# Altium PCB RadCounterX4_PCB.PcbDoc
Units mil, origin at the board's own origin, x right, y up, seen from the top; angles counter-clockwise.
Board outline 1510 x 1880 mil, 2 copper layers (Top Layer, Bottom Layer); 40 components, 42 nets, 192 pads, 81 vias.
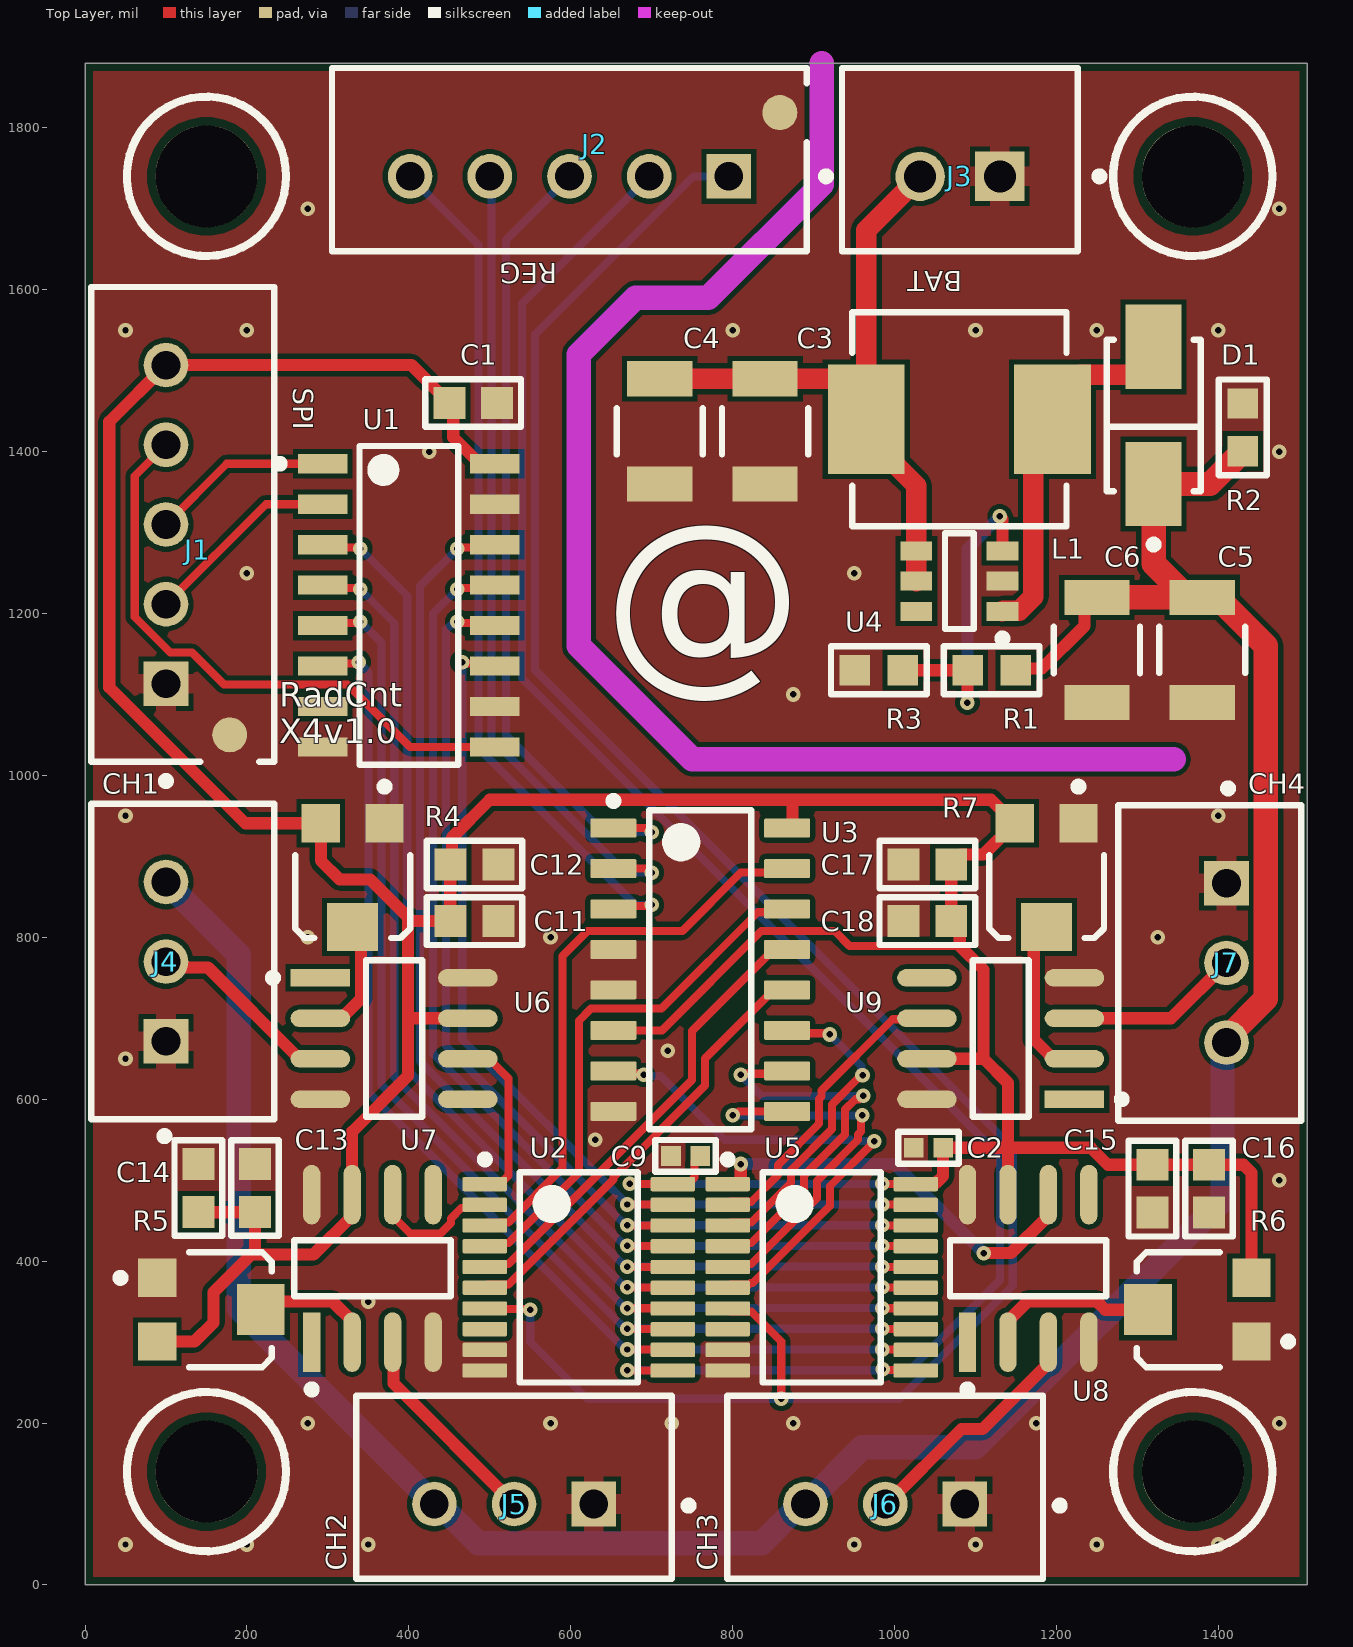
[diagram p0: Top Layer view]
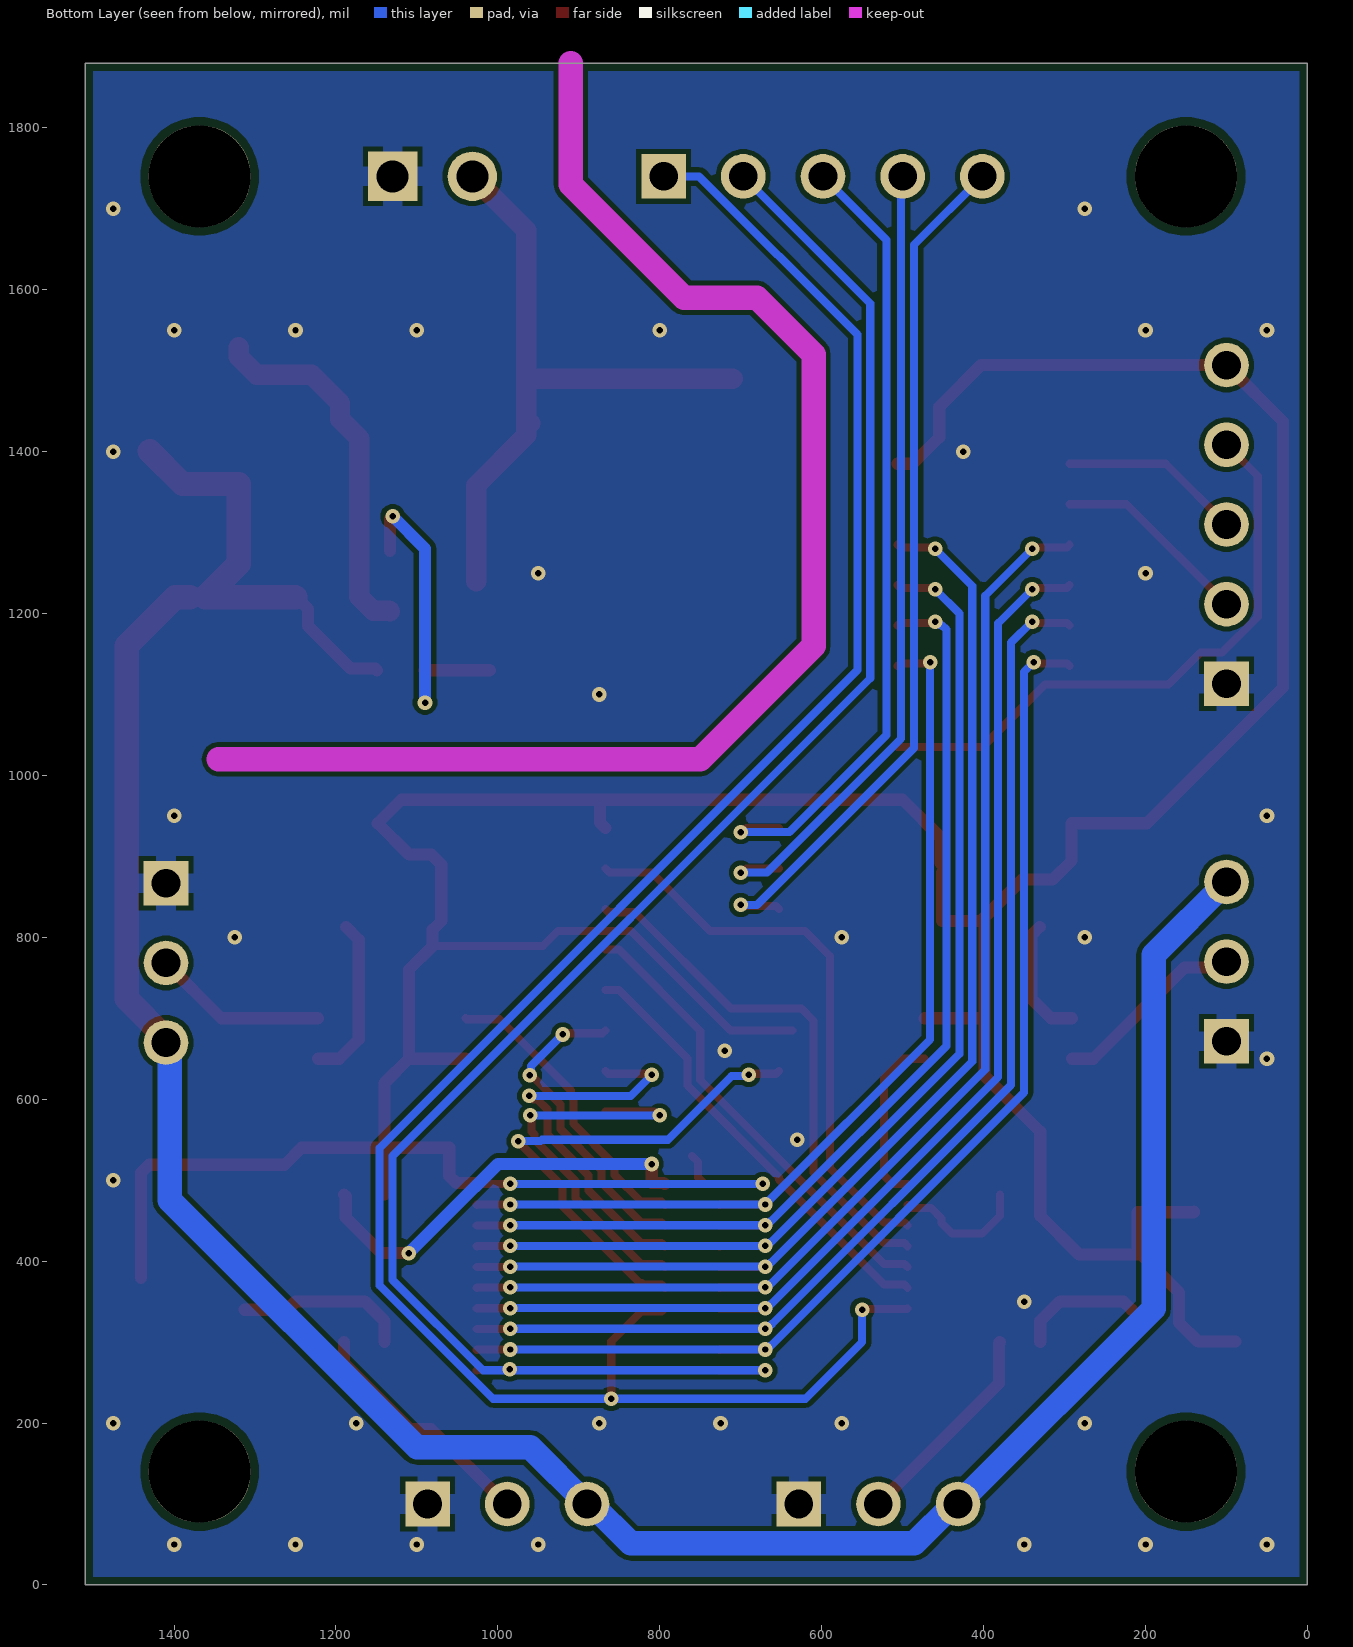
[diagram p1: Bottom Layer view, seen from below]
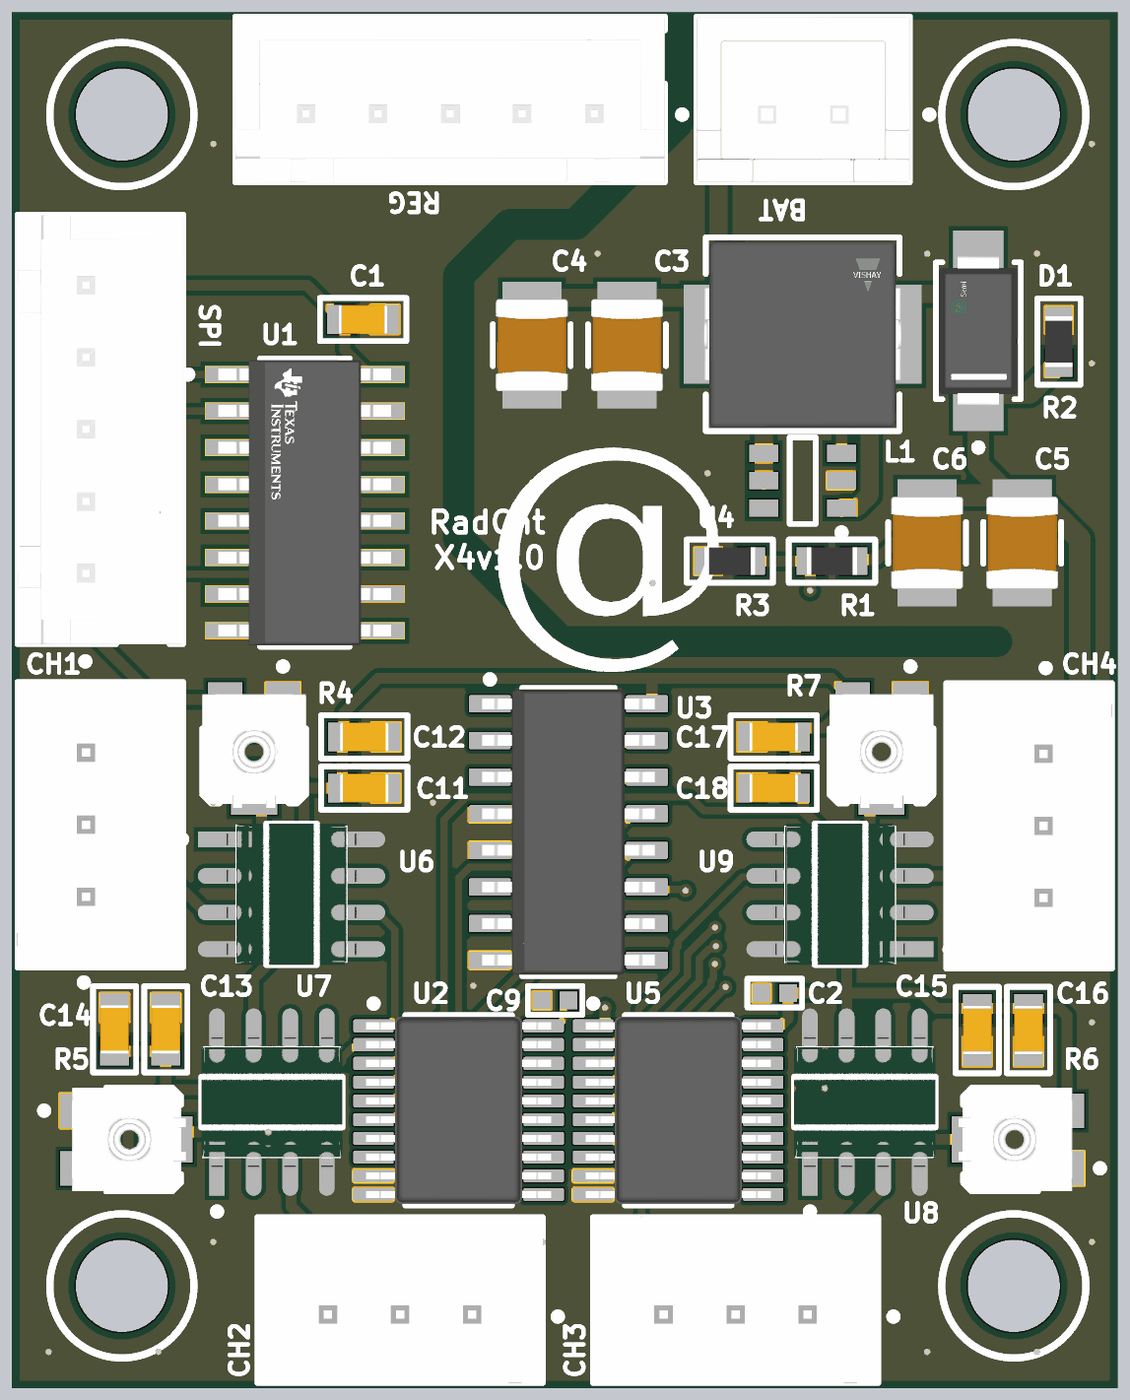
[diagram p2: 3D render of the assembled board from above, using the file's embedded part models]

## Layer stack, top to bottom
Top Solder: solder mask 0.4, Solder Resist, Dk 3.5
Top Layer: signal copper 1.4
Dielectric 1: dielectric 12.6, FR-4, Dk 4.8
Bottom Layer: signal copper 1.4
Bottom Solder: solder mask 0.4, Solder Resist, Dk 3.5

## Board outline
0,0 1510,0 1510,1880 0,1880

## Design rules (kind name [scope] priority, off if disabled: settings)
BoardOutlineClearance [All] p1: gap=10 ignorepadtopadclearanceinfootprint=FALSE except(0: Arc-SplitContinuation Track-SplitContinuation SMDPad-SplitContinuation THPad-SplitContinuation Via-SplitContinuation Fill-SplitContinuation Poly-SplitContinuation Region-SplitContinuation Text-SplitContinuation)
Clearance Clearance_Ant [InNet('ANT')] p1: gap=20 ignorepadtopadclearanceinfootprint=TRUE except(0: Via-Text Fill-Text Poly-Text Region-Text Text-Text; 8: Via-Fill Via-Poly Via-Region Fill-Fill Fill-Poly Fill-Region Poly-Poly Poly-Region Region-Region; 10: Arc-SMDPad Track-SMDPad Via-Hole Fill-Hole Poly-Hole Region-Hole Text-Hole)
Clearance [All] p2: gap=6 ignorepadtopadclearanceinfootprint=TRUE except(0: Arc-Text Track-Text SMDPad-Text THPad-Text Via-Text Fill-Text Poly-Text Region-Text Text-Text; 10: Arc-Hole Track-Hole SMDPad-SMDPad SMDPad-THPad SMDPad-Via SMDPad-Hole THPad-THPad THPad-Via THPad-Hole Via-Hole Fill-Hole Poly-Hole Region-Hole Text-Hole)
MinimumSolderMaskSliver [All] p1: minsoldermaskwidth=2
PolygonConnect PolygonConnect_Ant [HasFootprint('433MHz_Ant')] p1: thpad.connectstyle=Relief thpad.reliefconductorwidth=25 thpad.reliefentries=4 thpad.polygonreliefangle="90 Angle" thpad.airgapwidth=10 smdpad.connectstyle=Direct smdpad.reliefconductorwidth=25 smdpad.reliefentries=4 smdpad.polygonreliefangle="90 Angle" smdpad.airgapwidth=10 via.connectstyle=Direct via.reliefconductorwidth=25 via.reliefentries=4 via.polygonreliefangle="90 Angle" via.airgapwidth=0
PolygonConnect [All] p2: thpad.connectstyle=Relief thpad.reliefconductorwidth=25 thpad.reliefentries=4 thpad.polygonreliefangle="90 Angle" thpad.airgapwidth=6 smdpad.connectstyle=Direct smdpad.reliefconductorwidth=10 smdpad.reliefentries=4 smdpad.polygonreliefangle="90 Angle" smdpad.airgapwidth=10 via.connectstyle=Direct via.reliefconductorwidth=25 via.reliefentries=4 via.polygonreliefangle="90 Angle" via.airgapwidth=0
RoutingVias [All] p1: holewidth=8 width=18 viastyle="Through Hole" minholewidth=8 minwidth=18 maxholewidth=24 maxwidth=50
SilkToSilkClearance [All] p1: silktosilkclearance=0
SilkToSolderMaskClearance [IsPad] p1: minsilkscreentomaskgap=1 clearancetoexposedcopper=TRUE
SolderMaskExpansion SolderMaskExpansion_via [IsVia] p1: expansion=4 istentingtop=TRUE
SolderMaskExpansion [All] p2: expansion=2 istentingtop=FALSE
SupplyNets "Schematic Supply Nets_4" [InNet('Vbat')] p1: voltage=0.000
SupplyNets "Schematic Supply Nets_1" [InNet('+27')] p2: voltage=0.000
SupplyNets "Schematic Supply Nets_6" [InNet('+3.3')] p3: voltage=0.000
SupplyNets "Schematic Supply Nets" [InNet('GND')] p4: voltage=0.000
Width [All] p1: maxlimit=100 minlimit=6 preferedwidth=10
27 further rules are at their usual default settings.

## Components (designator, comment, footprint, x,y, rotation, side; value= is the part's Value field where it differs from the comment)
C1 "100n" C0603 479.53,1460 r180 top
C2 "100n" C0402 1041.89,540 r0 top
C3 "10u" FP-GRM32-MFG 840,1425.04 r270 top value=10uF
C4 "10u" FP-GRM32-MFG 710,1425.04 r270 top value=10uF
C5 "10u" FP-GRM32-MFG 1380,1155.04 r270 top value=10uF
C6 "10u" FP-GRM32-MFG 1250,1154.96 r270 top value=10uF
C9 "100n" C0402 741.89,530 r0 top
C11 "100n" C0603 481.14,820 r0 top
C12 "22u" C0603 481.14,890 r0 top
C13 "100n" C0603 210,490.47 r90 top
C14 "22u" C0603 140,490.47 r90 top
C15 "100n" C0603 1318.43,489.53 r270 top
C16 "22u" C0603 1388.43,489.53 r270 top
C17 "100n" C0603 1040.47,890 r180 top
C18 "22u" C0603 1040.47,820 r180 top
D1 "SS34" FP-403AE-MFG 1320,1444.65 r270 top
J1 "SPI" FP-B5B-XH-AM_LF_SN-MFG 120.67,1310 r270 top
J2 "REG" FP-B5B-XH-AM_LF_SN-MFG 598.43,1760.67 r0 top
J3 "BAT" FP-B2B-XH-A_LF_SN-MFG 1080.79,1760.67 r180 top
J4 "CH1" FP-B3B-XH-A_LF_SN-MFG 120.67,770 r90 top
J5 "CH2" FP-B3B-XH-A_LF_SN-MFG 530,120.67 r180 top
J6 "CH3" FP-B3B-XH-A_LF_SN-MFG 988.43,120.67 r180 top
J7 "CH4" FP-B3B-XH-A_LF_SN-MFG 1389.33,768.43 r270 top
L1 "22uH" FP-IHLP-2525CZ-FP_2_413x3-MFG 1080,1440 r0 top
R1 "442k" R0603 1120,1130 r180 top
R2 "10k" R0603 1430,1430 r270 top
R3 "10k" R0603 980.47,1130 r0 top
R4 "TC33X-2-103E" BOUR-TC33X-2_V 330.67,870 r270 top
R5 "TC33X-2-103E" BOUR-TC33X-2_V 160,340 r0 top
R6 "TC33X-2-103E" BOUR-TC33X-2_V 1370,340 r180 top
R7 "TC33X-2-103E" BOUR-TC33X-2_V 1187.76,870 r270 top
U1 "SN74HC165DR" FP-D0016A-MFG 400,1210 r0 top
U2 "SN74LV8154PWR" PW0020A_N 610,380 r0 top
U3 "SN74HC138D" D0016A_N 760,760 r0 top
U4 "MT3608" SOT23 1080,1240 r180 top
U5 "SN74LV8154PWR" PW0020A_N 910,380 r0 top
U6 "TLV3501AID" FP-D0008A-IPC_C 381.76,675 r0 top
U7 "TLV3501AID" FP-D0008A-IPC_C 355,391.09 r90 top
U8 "TLV3501AID" FP-D0008A-IPC_C 1165,391.09 r90 top
U9 "TLV3501AID" FP-D0008A-IPC_C 1131.09,675 r180 top

## Footprints (in the part's own frame and the unit in brackets; to place one, negate y for a bottom-side part, rotate by r counter-clockwise, add the part's x,y. Pads: shape width x height; smd on the part's side, far side on the other; paste and mask are expansions set on the pad)
BOUR-TC33X-2_V [mm] "SMD, 3-Leads, Body 3.8x3.6mm"
  rect 1.2x1.2 smd: 1(-1.8,1) 3(-1.8,-1)
  rect 1.5x1.6 smd: 2(1.45,0)
  silkscreen extent -3.07,-1.8 1.8,1.8, body extent -2,-1.8 1.96,1.8, height 1.15
C0402 [mm] "Chip Capacitor, 2-Leads, Body 1,00x0,50mm, IPC Medium Density"
  rect 0.62x0.62 smd: 1(-0.46,0) 2(0.46,0)
  silkscreen extent -0.95,-0.5 0.95,0.5, body extent -0.53,-0.28 0.53,0.27, height 0.22
C0603 [mm] "Chip Capacitor, 2-Leads, Body 1,60x0,80mm, IPC Medium Density"
  rect 1x1 smd: 1(-0.75,0) 2(0.75,0)
  silkscreen extent -1.5,-0.75 1.5,0.75, body extent -0.85,-0.5 0.85,0.5, height 0.9
D0016A_N [mm] "SOIC, 16-Leads, Body 10x4mm, Pitch 1.27mm, IPC Medium Density"
  rrect17% 1.45x0.6 smd: 1(-2.725,4.445) 2(-2.725,3.175) 3(-2.725,1.905) 4(-2.725,0.635) 5(-2.725,-0.635) 6(-2.725,-1.905) 7(-2.725,-3.175) 8(-2.725,-4.445) 9(2.725,-4.445) 10(2.725,-3.175) 11(2.725,-1.905) 12(2.725,-0.635) 13(2.725,0.635) 14(2.725,1.905) 15(2.725,3.175) 16(2.725,4.445)
  silkscreen extent -2.85,-5 1.6,5.42, body extent -3,-4.95 3,4.95, height 1.59
FP-403AE-MFG [mm]
  rect 2.65x1.75 smd paste+0 mask+0: 1(-2.15,0) 2(2.15,0)
  silkscreen extent -2.37,-1.48 4.17,1.48, body extent -3.57,-1.58 3.57,1.58, height 0.25
FP-B2B-XH-A_LF_SN-MFG [mm]
  rect 1.55x1.55 hole 1 paste-2539.97 mask+0: 1(-1.25,0.525)
  round 1.55 hole 1 paste-2539.97 mask+0: 2(1.25,0.525)
  silkscreen extent -4.5,-2.88 3.7,2.88, body extent -3.8,-2.98 3.8,2.98, height 0.25
FP-B3B-XH-A_LF_SN-MFG [mm]
  rect 1.4x1.4 hole 0.9 paste-2539.97 mask+0: 1(-2.5,0.525)
  round 1.4 hole 0.9 paste-2539.97 mask+0: 2(0,0.525) 3(2.5,0.525)
  silkscreen extent -5.6,-2.88 4.95,2.88, body extent -5.05,-2.98 5.05,2.98, height 0.25
FP-B5B-XH-AM_LF_SN-MFG [mm]
  rect 1.4x1.4 hole 0.9 paste-2539.97 mask+0: 1(5,-0.525)
  round 1.4 hole 0.9 paste-2539.97 mask+0: 2(2.5,-0.525) 3(0,-0.525) 4(-2.5,-0.525) 5(-5,-0.525)
  round 1.1 smd paste-2539.97 mask+0: ""(6.6,1.475)
  silkscreen extent -7.45,-2.88 8.17,2.88, body extent -7.55,-2.98 7.55,2.98, height 0.25
FP-D0008A-IPC_C [mil]
  rect 73.59x21.34 smd paste+0 mask+0: 1(-91.09,75)
  rrect100% 73.59x21.34 smd paste+0 mask+0: 2(-91.09,25) 3(-91.09,-25) 4(-91.09,-75) 5(91.09,-75) 6(91.09,-25) 7(91.09,25) 8(91.09,75)
  silkscreen extent -154,-97 35,97, body extent -132,-100 132,100, height 10
FP-D0016A-MFG [mm]
  rect 1.55x0.6 smd paste-1000 mask+0: 1(-2.7,4.445) 2(-2.7,3.175) 3(-2.7,1.905) 4(-2.7,0.635) 5(-2.7,-0.635) 6(-2.7,-1.905) 7(-2.7,-3.175) 8(-2.7,-4.445) 9(2.7,-4.445) 10(2.7,-3.175) 11(2.7,-1.905) 12(2.7,-0.635) 13(2.7,0.635) 14(2.7,1.905) 15(2.7,3.175) 16(2.7,4.445)
  silkscreen extent -4.17,-5 1.55,5, body extent -3.57,-5.25 3.57,5.25, height 0.25
FP-GRM32-MFG [mm]
  rect 1.1x2.05 smd paste+0 mask+0: 1(-1.65,0) 2(1.65,0)
  silkscreen extent -0.72,-1.35 0.72,1.35, body extent -2.3,-1.45 2.3,1.45, height 0.25
FP-IHLP-2525CZ-FP_2_413x3-MFG [mil]
  rect 95x135 smd paste+0 mask+0: 1(-115,0) 2(115,0)
  silkscreen extent -132,-132 132,132, body extent -166,-136 166,136, height 10
PW0020A_N [mm] "SOP, 20-Leads, Body 6.6x4.5mm, Pitch 0.65mm, IPC Medium Density"
  rrect22% 1.4x0.45 smd: 1(-2.95,2.925) 2(-2.95,2.275) 3(-2.95,1.625) 4(-2.95,0.975) 5(-2.95,0.325) 6(-2.95,-0.325) 7(-2.95,-0.975) 8(-2.95,-1.625) 9(-2.95,-2.275) 10(-2.95,-2.925) 11(2.95,-2.925) 12(2.95,-2.275) 13(2.95,-1.625) 14(2.95,-0.975) 15(2.95,-0.325) 16(2.95,0.325) 17(2.95,0.975) 18(2.95,1.625) 19(2.95,2.275) 20(2.95,2.925)
  silkscreen extent -3.07,-3.3 1.85,3.82, body extent -3.21,-3.25 3.21,3.25, height 1
R0603 [mm] "Chip Resistor, 2-Leads, Body 1,60x0,80mm, IPC Medium Density"
  rect 0.95x0.95 smd: 1(-0.75,0) 2(0.75,0)
  silkscreen extent -1.5,-0.75 1.5,0.75, body extent -0.87,-0.48 0.87,0.48, height 0.55
SOT23 [mm] "SOT23, 6-Leads, Body 2,90x2,80mm, Pitch 0,95mm, IPC Medium Density"
  rect 1x0.6 smd: 1(-1.35,0.95) 2(-1.35,0) 3(-1.35,-0.95) 4(1.35,-0.95) 5(1.35,0) 6(1.35,0.95)
  silkscreen extent -1.48,-1.5 0.45,1.92, body extent -0.85,-1.5 0.85,1.5, height 1.2

## Part data
C1 C2 C9 C11 C12 C13 C14 C15 C16 C17 C18: library part Capacitor, "Generic SMD Capacitor"
C3 C4 C5 C6: library part CMP-2000-05261-2, "CAP CER 10UF 50V X7R 1210", Capacitance=10uF, Manufacturer=Murata, Manufacturer Part Number=GRM32ER71H106KA12L, Package=GRM32, Temperature="-55°C to +125°C", Temperature Characteristic=X7R, Temperature Coefficient=15%, Temperature Range High=+125°C, Temperature Range Low=-55°C, Tolerance=10%, Voltage Rating=50V, Automotive=No, Category=Cap, ComponentLink2Description=Datasheet, ComponentLink2URL=https://search.murata.co.jp/Ceramy/image/img/A01X/G101/ENG/GRM32ER71H106KA12-01.pdf, Device Class L1="Passive Components", Device Class L2=Capacitors, Device Class L3="Ceramic Capacitors", Digikey Description="CAP CER 10UF 50V X7R 1210", Height=2.7mm, Lead Free=Yes, Material=Ceramic, Mouser Description="1210 10 uF 50 V ±10% Tolerance X7R SMT Multilayer Ceramic Capacitor", Octopart=https://octopart.com/grm32er71h106ka12l-murata-10470987, RoHS=TRUE
D1: library part CMP-2000-04943-2, "DIODE SCHOTTKY 40V 1A SMA", Forward Current=1A, Manufacturer="ON Semiconductor", Max Junction Temp=+125°C, Max Repetitive Reverse Voltage=40V, Max Surge Forward Current=40A, Package=403AE, Peak Reverse Current=0.2mA, Temperature="-65°C to +125°C", Temperature Range Low=-65°C, Automotive=No, Category=Diode, ComponentLink2Description=Datasheet, ComponentLink2URL=https://www.onsemi.com/pub/Collateral/SS19-D.PDF, Device Class L1="Discrete Semiconductors", Device Class L2=Diodes, Device Class L3="Schottky Diodes", Digikey Description="DIODE SCHOTTKY 40V 1A SMA", Height=2.5mm, Lead Free=Yes, Manufacturer Part Number=SS34, Mouser Description="Schottky Diodes & Rectifiers SMA 40V 1.0A", Octopart=https://octopart.com/ss14-on+semiconductor-29205033, RoHS=TRUE, Standoff Height=0.05mm, Temperature Range High=+125°C
J1 J2: library part CMP-17439-000304-1, "CONN HEADER VERT 5POS 2.5MM", Color=Green, Contact Resistance=20mR, Flammability Rating="UL94 V-0", Housing Color=White, Insulation Color=Natural, Max Current Rating=3A, Max Operating Temperature=85°C, Max Voltage Rating (AC)=250V, Min Operating Temperature=-25°C, Connector Type=Header, Contact Finish - Mating=TIN, Contact Material=Brass, Contact Plating=Copper, Contact Shape=Square, Contact Type="Male Pin", Depth=5.75mm, Fastening Type=Detent, Housing Material=Polyamide, Insulation Material=Nylon, Lead Free="Lead Free", Length=14.9mm, Mated Stacking Heights=9.8mm, Mount="Through Hole", Number of Positions=5, Number of Rows=1, Orientation=Straight, Packaging=Bulk, Pitch=2.5mm, Series=XH, Termination=Solder, Voltage Rating=250V
J3: library part CMP-2000-05888-3, "CONN HEADER VERT 2POS 2.5MM", Color=Natural, Contact Resistance=20mR, Current Rating=3A, Housing Color=White, Insulation Resistance=1GR, Max Operating Temperature=85°C, Max Voltage Rating (AC)=250V, Min Operating Temperature=-25°C, Connector Type="Male Pin", Contact Material=Brass, Contact Plating=Tin, Contact Type="Male Pin", Depth=5.75mm, Fastening Type=Detent, Housing Material=Polyamide, Lead Free="Lead Free", Lead Pitch=2.5mm, Length=7.4mm, Max Current Rating=3A, Max Voltage Rating (DC)=250V, Mount="Through Hole", Number Of Contacts=2, Number of Positions=2, Number of Rows=1, Orientation=Straight, Packaging=Bulk, Pitch=2.5mm, REACH SVHC="No SVHC", Series=XH, Termination=Solder, Voltage Rating=250V, Voltage Rating (AC)=250V, Wire/Cable Gauge=22AWG
J4 J5 J6 J7: library part CMP-17439-000014-3, "CONN HEADER VERT 3POS 2.5MM", Color=Natural, Contact Resistance=20mR, Current Rating=3A, Flammability Rating="UL94 V-0", Housing Color=White, Insulation Resistance=1GR, Max Operating Temperature=85°C, Max Voltage Rating (AC)=250V, Min Operating Temperature=-25°C, Connector Type=Header, Contact Finish - Mating=TIN, Contact Material=Brass, Contact Plating=Tin, Contact Shape=Square, Contact Type="Male Pin", Depth=5.75mm, Fastening Type=Detent, Gender=Male, Housing Material=Polyamide, Insulation Color=Natural, Insulation Material=Nylon, Lead Free="Lead Free", Lead Pitch=2.5mm, Length=9.9mm, Max Current Rating=3A, Max Voltage Rating (DC)=250V, Mount="Through Hole", Number Of Contacts=3, Number of Positions=3, Number of Rows=1, Orientation=Straight, Packaging=Bulk, Pitch=2.5mm, REACH SVHC="No SVHC", Series=XH, Termination=Solder, Voltage Rating=250V, Voltage Rating (AC)=250V, Wire/Cable Gauge=22AWG
L1: library part CMP-2000-06442-2, "Commercial Inductors, Low DCR Series 22uH 2.9A 135mΩ 20%", Case Code (Imperial)=2525, Case Code (Metric)=6363, Current Rating=2.9A, DC Resistance (DCR)=135mR, Inductance Tolerance=20%, Max Operating Temperature=125°C, Min Operating Temperature=-55°C, Package Quantity=2000, Saturation Current=2.5A, Self Resonant Frequency=1MHz, Test Frequency=100kHz, Case/Package=2525, Contact Plating=Tin, Core Material=Ferrite, Depth=6.72mm, Height=3mm, Height - Seated (Max)=0.118inch, Inductance=22uH, Lead Free="Lead Free", Length=7.24mm, Max DC Current=2.9A, Military Standard=Not, Mount="Surface Mount", Number of Pins=2, Packaging="Tape and Reel", Radiation Hardening=No, RMS Current (Irms)=2.9A, Shielding=Shielded, Termination=SMD/SMT, Tolerance=20%, Width=0.255inch
R1 R2 R3: library part Resistor, "Generic SMD Resistor"
R4 R5 R6 R7: library part CMP-2100-03695-1, "Trimming Potentiometer, 10000 Ohm, -40 to 100 degC, 3-Pin SMD, RoHS, Tape and Reel", Case/Package=SMD/SMT, Colour=Silver, Manufacturer=Bourns, Max Operating Temperature=100degC, Max Power Dissipation=100mW, Min Operating Temperature=-40degC, Package Description="3-Pin Surface Mount Device, Body 3.8 x 3.6 mm", Package Quantity=2500, Package Reference=TC33X-2, Resistance=10KOhm, Temperature Coefficient=250ppm/degreesC, Tolerance=25%, Voltage Rating (DC)=50V, Composition=Potentiometer, Contact Plating=Silver, Datasheet URL=http://www.bourns.com/docs/Product-Datasheets/TC33.pdf, Datasheet Version=42583.0, Depth=3.8mm, Height=0.047inch, Lead Free=LeadFree, Length=3mm, Manufacturer URL=http://www.bourns.com/, Military Standard=Not, Mount=SurfaceMount, Number of Turns=1, Packaging=TapeandReel, Power Rating=100mW, Radiation Hardening=No, REACH SVHC=NoSVHC, RoHSCompliant=true, Taper=Linear, Termination=FootPrint, Weight=29.4mg, Width=0.118inch
U1: library part CMP-0780-00020-4, "IC 8-BIT SHIFT REGISTER 16-SOIC", Ambient Temperature Range High=+125°C, Ambient Temperature Range Low=-40°C, Frequency=62MHz, Manufacturer="Texas Instruments", Max Supply Voltage=6V, Min Supply Voltage=2V, Nominal Supply Current=8uA, Package=D0016A, Temperature="-40°C to +125°C", Automotive=No, Category=IC, ComponentLink2Description=Datasheet, ComponentLink2URL=https://www.ti.com/lit/ds/symlink/sn74hc165.pdf, Device Class L1="Integrated Circuits (ICs)", Device Class L2="Logic ICs", Device Class L3="Shift Registers", Digikey Description="IC 8-BIT SHIFT REGISTER 16-SOIC", Height=1.75mm, Lead Free=Yes, Logic Function Desc=Non-Inverting, Manufacturer Part Number=SN74HC165DR, Mouser Description="Counter Shift Registers 8-Bit Parallel-Load", Number Of Circuits=1, Number of Inputs=8, Number of Outputs=1, Octopart=https://octopart.com/sn74hc165dr-texas+instruments-500689, Propagation Delay=13ns, RoHS=TRUE, Standoff Height=0.1mm, Temperature Range High=+125°C, Temperature Range Low=-40°C
U2 U5: library part CMP-1623-00713-2, "Dual 16-Bit Binary Counters with 3-State Output Registers, PW0020A, LARGE T&R", F @ Nom Voltage(Max)(Mhz)=40, Generic Part Number=SN74LV8154, ICC @ Nom Voltage(Max)(mA)=0.02, Manufacturer="Texas Instruments", Operating Temperature Range(C)="-40 to 85", Rating=Catalog, tpd @ Nom Voltage(Max)(ns)=27, Voltage(Nom)(V)=2.5,3.3,5, Bits(#)=16, Code_JEDEC=MO-153, DatasheetVersion=SCLS589, Function=Counter, Input Type=CMOS, Inputs=1, Output Drive (IOL/IOH)(Max)(mA)=12/-12, Output Type=CMOS, PackageReference=PW0020A, Schmitt Trigger=No, Technology Family=LV-A, Type=Binary, VCC(Max)(V)=5.5, VCC(Min)(V)=2
U3: library part CMP-1633-00243-2, "3-Line To 8-Line Decoders/Demultiplexers, D0016A, TUBE", F @ Nom Voltage(Max)(Mhz)=28, Generic Part Number=SN74HC138, ICC @ Nom Voltage(Max)(mA)=0.08, Manufacturer="Texas Instruments", Operating Temperature Range(C)="-40 to 85", Rating=Catalog, tpd @ Nom Voltage(Max)(ns)=45, Voltage(Nom)(V)=3.3,5, Bits(#)=8, Channels(#)=1, Code_JEDEC="MS-012 variation AC", Configuration=3：8, DatasheetVersion=SCLS107E, Function=Decoder/Demultiplexer, Input Type=LVTTL/CMOS, Output Drive (IOL/IOH)(Max)(mA)=5.2/-5.2, Output Type=CMOS, PackageReference=D0016A, Schmitt Trigger=No, Technology Family=HC, Type=Standard, VCC(Max)(V)=6, VCC(Min)(V)=2
U4: "2A, High Efficiency 1.2MHz Current Mode Step-Up Converter"
U6 U7 U8 U9: library part CMP-04896-000133-1, "IC COMPARATOR 4.5NS R-R HS 8SOIC", Case/Package=SOIC, Input Bias Current=10pA, Input Offset Voltage (Vos)=6.5mV, Max Operating Temperature=125°C, Max Supply Voltage=5.5V, Min Operating Temperature=-40°C, Min Supply Voltage=2.7V, Nominal Supply Current=3.2mA, Operating Supply Current=5mA, Output Current=74mA, Package Quantity=75, Power Supply Rejection Ratio (PSRR)=100dB, Common Mode Rejection Ratio=70dB, Height=1.58mm, Hysteresis=6mV, Lead Free="Lead Free", Length=4.9mm, Mount="Surface Mount", Number of Channels=1, Number of Elements=1, Number of Pins=8, Output Type=TTL, Packaging=Rail/Tube, Propagation Delay=10ns, Quiescent Current=5mA, Radiation Hardening=No, REACH SVHC="No SVHC", Response Time=4.5ns, RoHS Compliant=Yes, Supply Type=Single, Type="General Purpose", Weight=0.002677oz, Width=3.91mm

## Free pads (board coordinates)
  round 125.98 hole 125.98 unplated: 5(150,140) 5(150,1740) 5(1368.42,1740) 5(1368.43,140)

## Via types
v1: diameter 18, hole 8, Top Layer to Bottom Layer, tented both sides, 81 vias

## Nets (pads, with @x,y where several pads share a name; then routed paths per layer and width w, separated by ;. In a path a pad name is that pad's centre, name@x,y a point inside that pad or via, vN(x,y) a via of type N, cw(c..) or ccw(c..) an arc to the next point about the centre after c; other vN are vias at no path point)
+3.3: C1.2 C2.2 C9.2 C11.1 C12.1 C13.1 C14.1 C15.1 C16.1 C17.1 C18.1 J1.5 R4.3 R5.3 R6.3 R7.3 U1.16 U2.20 U3.6 U3.16 U5.20 U6.7 U7.7 U8.7 U9.7 | length 5439
  Top Layer w10: C12.1@451.14,880 C12.1@451.14,889.53 ; U3.6@635.98,685 U3.6 712.55,685 835.36,807.81 926.03,807.81 944.52,789.31 1080.5,789.31 1080.6,789.4 ; v1(672.8,495.48) 672.96,495.32 725.98,495.32 U2.20 744.84,495.16 752.8,503.11 752.8,522.8 C9.2 ; v1(984.62,495.59) 984.83,495.37 1025.93,495.37 U5.20 ; U9.7@1038.79,648.79 U9.7
  Top Layer w15: R5.3 135.26,300.63 158.61,323.99 158.61,361.64 205.21,408.24 ; C14.1 140.47,460.47 209.53,460.47 210,460 210,413.03 205.21,408.24 ; C12.1@451.14,880 451.14,820.47 450.67,820 403.7,820 398.91,824.79 ; C12.1@451.14,889.53 453.4,891.78 453.4,923.4 500,970 874.05,970 ; U6.7 400,700 398.91,701.09 ; U1.16 487.6,1385 454.78,1417.81 454.78,1455.22 C1.2 403.15,1506.85 J1.5 30,1436.85 30,1108.94 198.07,940.87 R4.3 291.3,894.74 314.65,871.39 352.31,871.39 398.91,824.79 ; U3.16 874.05,941.76 874.05,970 ; U5.20 1027.5,496.52 1051.21,496.52 1060,505.3 1060,534.51 C2.2 1140,540 ; U9.7 1110,650 ; U8.7 1140,540 ; R6.3 1440.87,509.13 1430.94,519.06 C16.1 C15.1 1263.42,519.06 1242.48,540 1140,540 ; 205.21,408.24 282.19,408.24 330,456.05 U7.7 330,560 398.91,628.91 398.91,701.09 ; 398.91,701.09 398.91,824.79 ; 874.05,970 1119.25,970 R7.3 1109.7,902.19 1082.19,902.19 C17.1 C18.1 1080.6,809.4 1080.6,789.4 1110,760 1110,650 ; 1110,650 1140,620 1140,540
  Bottom Layer w10: v1(672.8,495.48) 984.51,495.48 v1(984.62,495.59)
+27: C5.1 C6.1 D1.2 J4.3 J5.3 J6.3 J7.3 R1.1 R2.2 | length 3430.9
  Top Layer w15: R1.1 1151.47,1131.94 1181.94,1131.94 1234.55,1184.55 1234.55,1205.77 1248.75,1219.96 C6.1@1250.04,1219.96
  Top Layer w30: C6.1@1250.04,1219.96 1361.34,1219.96 1320,1261.3 D1.2 1389.53,1360 R2.2 ; C5.1 1398.7,1220 1458.56,1160.14 1458.56,1010 1458.56,724.05 1410,675.5 J7.3
  Bottom Layer w30: J4.3 190,778.43 190,341.57 J5.3 437.07,100 485.63,51.44 835.95,51.44 884.5,100 J6.3 960,170 1100,170 1405.19,475.19 1405.19,665.19 J7.3
ADR0: J2.3 U3.1 | length 1001.5
  Top Layer w10: U3.1 692.84,935 697.84,930 v1(700,930)
  Bottom Layer w10: J2.3 520,1661.57 520,1050 640,930 v1(700,930)
ADR1: J2.4 U3.2 | length 1011.3
  Top Layer w10: U3.2 692.84,885 697.84,880 v1(700,880)
  Bottom Layer w10: J2.4 502,1738 502,1045.37 667.37,880 v1(700,880)
ADR2: J2.5 U3.3 | length 1084.7
  Top Layer w10: U3.3 656.19,838.47 698.47,838.47 v1(700,840)
  Bottom Layer w10: J2.5 486,1655.57 486,1034 680,840 v1(700,840)
CH_1: U2.1 U6.6 | length 214.1
  Top Layer w10: U6.6 498.97,650 523.14,625.83 523.14,505.74 512.56,495.16 U2.1
CH_2: U2.2 U7.6 | length 166.8
  Top Layer w10: U7.6 380,456.05 401.67,434.38 438.98,434.38 451.87,447.27 451.87,452.82 464.76,465.71 490,465.71 U2.2
CH_3: U5.1 U8.6 | length 510.9
  Top Layer w15: U5.1 795.22,496.52 810,496.52 v1(810,520) ; v1(1110,410) 1143.95,410 1187.93,453.98 1187.93,480.1 U8.6
  Bottom Layer w15: v1(810,520) 1000,520 1059.71,460.29 v1(1110,410)
CH_4: U5.2 U9.6 | length 371.2
  Top Layer w10: U5.2 797.72,473.43 822.96,473.43 856,506.47 856,518.98 906.83,569.81 906.83,600.37 909.76,603.3 909.76,610.75 997.79,698.79 1038.79,698.79 U9.6
CS: J1.3 U1.1 | length 224.8
  Top Layer w10: J1.3 175,1385 U1.1
GND: C1.1 C2.1 C3.2 C4.2 C5.2 C6.2 C9.1 C11.2 C12.2 C13.2 C14.2 C15.2 C16.2 C17.2 C18.2 J1. J1.1 J2. J3.1 J4.1 J5.1 J6.1 J7.1 R2.1 R3.1 R4.1 R5.1 R6.1 R7.1 U1.8 U1.10 U1.15 U2.9 U2.10 U3.4 U3.5 U3.8 U4.2 U5.9 U5.10 U6.4 U6.8 U7.4 U7.8 U8.4 U8.8 U9.4 U9.8
  other v1: 50,50 200,50 350,50 950,50 1100,50 1250,50 1400,50 275,200 575,200 725,200 875,200 1175,200 1475,200 350,350 1475,500 630,550 50,650 720,660 275,800 575,800 1325,800 50,950 1400,950 875,1100 200,1250 950,1250 425,1400 1475,1400 50,1550 200,1550 800,1550 1100,1550 1250,1550 1400,1550 275,1700 1475,1700
MISO: J1.4 U1.9 | length 740.2
  Top Layer w10: J1.4 61.44,1369.87 61.44,1195.6 105.34,1151.71 132.12,1151.71 171.64,1112.19 324.39,1112.19 401.58,1035 U1.9
NetD1_1: D1.1 L1.2 U4.1 | length 455.8
  Top Layer w25: U4.1 1133.84,1203.29 1154.1,1203.29 1171.33,1220.53 1171.33,1416.33 L1.2 1195,1460 1230,1495 1298.05,1495 1320,1516.95 D1.1
NetJ4_2: J4.2 U6.3 | length 240.4
  Top Layer w15: J4.2 107.23,762.77 151.78,762.77 264.55,650 U6.3
NetJ5_2: J5.2 U7.3 | length 262.1
  Top Layer w15: U7.3 381.21,298.79 381.21,248.79 J5.2
NetJ6_2: J6.2 U8.3 | length 299.7
  Top Layer w15: J6.2 990,100 1082.49,192.49 1108.61,192.49 1190,273.88 U8.3
NetJ7_2: J7.2 U9.3 | length 216.2
  Top Layer w15: U9.3 1341.57,700 J7.2
NetR1_2: R1.2 R3.2 U4.3 | length 411.1
  Top Layer w15: R3.2 R1.2 1090.24,1129.76 1090.24,1090.24 v1(1090,1090) ; v1(1130,1320) 1133.15,1316.85 U4.3
  Bottom Layer w15: v1(1090,1090) 1090,1280 v1(1130,1320)
NetR4_2: R4.2 U6.2 | length 153.3
  Top Layer w15: U6.2 316.79,700 340.96,724.17 340.96,802.62 R4.2
NetR5_2: R5.2 U7.2 | length 153.3
  Top Layer w15: R5.2 227.38,350.29 305.83,350.29 330,326.12 U7.2
NetR6_2: R6.2 U8.2 | length 213.3
  Top Layer w15: U8.2 1140,326.12 1164.17,350.29 1250.01,350.29 1260.31,340 R6.2
NetR7_2: R7.2 U9.2 | length 205.6
  Top Layer w15: R7.2 1171.88,797.04 1171.88,674.17 1196.05,650 U9.2
NetU1_3: U1.3 U2.15 U5.15 | length 1511.6
  Top Layer w10: U1.3 297.17,1281.53 338.47,1281.53 v1(340,1280) ; v1(670,367.64) 670.22,367.42 725.93,367.42 U2.15 ; v1(984.62,367.64) 984.83,367.42 1025.93,367.42 U5.15
  Bottom Layer w10: v1(340,1280) 398,1222 398,636.94 661.72,373.23 662.24,373.23 667.84,367.64 v1(670,367.64) v1(984.62,367.64)
NetU1_4: U1.4 U2.14 U5.14 | length 1487.2
  Top Layer w10: U1.4 297.17,1231.53 338.47,1231.53 v1(340,1230) ; v1(670,342.05) 670.22,341.83 725.93,341.83 U2.14 ; v1(984.62,342.05) 984.83,341.83 1025.93,341.83 U5.14
  Bottom Layer w10: v1(340,1230) 382,1188 382,627.35 661.72,347.64 662.24,347.64 667.84,342.05 v1(670,342.05) v1(984.62,342.05)
NetU1_5: U1.5 U2.13 U5.13 | length 1472.8
  Top Layer w10: U1.5 297.17,1188.47 338.47,1188.47 v1(340,1190) ; v1(670,316.46) 670.22,316.24 725.93,316.24 U2.13 ; v1(984.62,316.46) 984.83,316.24 1025.93,316.24 U5.13
  Bottom Layer w10: v1(340,1190) 366,1164 366,617.76 661.72,322.05 662.24,322.05 667.84,316.46 v1(984.62,316.46)
NetU1_6: U1.6 U2.12 U5.12 | length 1447.2
  Top Layer w10: U1.6 297.17,1138.47 336.47,1138.47 v1(338,1140) ; v1(670,290.87) 670.22,290.65 725.93,290.65 U2.12 ; v1(984.62,290.87) 984.83,290.65 1025.93,290.65 U5.12
  Bottom Layer w10: v1(338,1140) 350,1128 350,608.17 661.72,296.46 662.24,296.46 667.84,290.87 v1(984.62,290.87)
NetU1_11: U1.11 U2.19 U5.19 | length 1209.5
  Top Layer w10: v1(466,1140) 467.53,1138.47 502.83,1138.47 U1.11 ; v1(670,470) 670.22,469.78 725.93,469.78 U2.19 ; v1(984.62,470) 984.83,469.78 1025.93,469.78 U5.19
  Bottom Layer w10: v1(466,1140) 466,674 v1(670,470) v1(984.62,470)
NetU1_12: U1.12 U2.18 U5.18 | length 1309.2
  Top Layer w10: v1(460,1190) 461.53,1188.47 502.83,1188.47 U1.12 ; v1(670,444.41) 670.22,444.19 725.93,444.19 U2.18 ; v1(984.62,444.41) 984.83,444.19 1025.93,444.19 U5.18
  Bottom Layer w10: v1(460,1190) 457.84,1190 453.84,1186 451.86,1186 446,1180.14 446,665.72 661.72,450 662.24,450 667.84,444.41 v1(670,444.41) v1(984.62,444.41)
NetU1_13: U1.13 U2.17 U5.17 | length 1385.6
  Top Layer w10: v1(460,1230) 461.53,1231.53 502.83,1231.53 U1.13 ; v1(670,418.82) 670.22,418.6 725.93,418.6 U2.17 ; v1(984.62,418.82) 984.83,418.6 1025.93,418.6 U5.17
  Bottom Layer w10: v1(460,1230) 430,1200 430,656.13 661.72,424.41 662.24,424.41 667.84,418.82 v1(670,418.82) v1(984.62,418.82)
NetU1_14: U1.14 U2.16 U5.16 | length 1474.5
  Top Layer w10: v1(460,1280) 461.53,1281.53 502.83,1281.53 U1.14 ; v1(670,393.23) 670.22,393.01 725.93,393.01 U2.16 ; v1(984.62,393.23) 984.83,393.01 1025.93,393.01 U5.16
  Bottom Layer w10: v1(460,1280) 414,1234 414,646.53 661.72,398.82 662.24,398.82 667.84,393.23 v1(670,393.23) v1(984.62,393.23)
NetU2_3: U2.3 U3.15 | length 709.7
  Top Layer w10: U2.3 497.72,447.83 522.96,447.83 590,514.88 590,777.02 620.79,807.81 737.81,807.81 810,880 862.28,880 U3.15
NetU2_4: U2.4 U3.14 | length 656
  Top Layer w10: U2.4 497.72,422.24 522.96,422.24 610,509.29 610,697.02 625.17,712.19 712.19,712.19 830.95,830.95 863.23,830.95 U3.14
NetU2_5: U2.5 U3.13 | length 571.5
  Top Layer w10: U2.5 497.72,396.65 522.96,396.65 750,623.7 750,684.45 850.55,785 U3.13
NetU2_6: U2.6 U3.12 | length 547.1
  Top Layer w10: U2.6 497.72,371.06 522.96,371.06 652.59,500.7 652.59,503.66 766,617.07 766,650.45 850.55,735 U3.12
NetU3_7: U3.7 U5.6 | length 628.7
  Top Layer w10: U3.7 656.19,631.53 688.47,631.53 v1(690,630) ; U5.6 797.72,371.06 820.4,371.06 822.28,372.94 824.83,372.94 920,468.1 920,492.47 974.75,547.23 v1(974.75,548.23)
  Bottom Layer w10: v1(690,630) 691.53,628.47 711.53,628.47 790,550 945.75,550 947.52,548.23 v1(974.75,548.23)
NetU3_9: U3.9 U5.5 | length 500.2
  Top Layer w10: U5.5 797.72,396.65 822.96,396.65 904,477.7 904,499.1 954.83,549.93 954.83,556.59 958.47,560.23 958.47,578.47 v1(960,580) ; v1(800,580) 802.16,580 807.16,585 U3.9
  Bottom Layer w10: v1(800,580) v1(960,580)
NetU3_10: U3.10 U5.4 | length 494.8
  Top Layer w10: U5.4 797.72,422.24 822.96,422.24 888,487.29 888,505.73 938.83,556.55 938.83,587.11 951.72,600 955.89,600 960,604.11 v1(961.48,604.11) ; v1(810,630) 811.53,631.53 863.81,631.53 U3.10
  Bottom Layer w10: v1(810,630) 835.89,604.11 v1(961.48,604.11)
NetU3_11: U3.11 U5.3 | length 392.3
  Top Layer w10: U5.3 797.72,447.83 822.96,447.83 872,496.88 872,512.35 922.83,563.18 922.83,593.74 958.67,629.59 v1(960.41,629.59) ; U3.11 870.75,681.53 918.47,681.53 v1(920,680)
  Bottom Layer w10: v1(920,680) 958.88,641.12 958.88,631.12 v1(960.41,629.59)
REG: J2.2 U2.11 U5.11 | length 2277.7
  Top Layer w10: v1(670,265.28) 670.22,265.06 725.93,265.06 U2.11 ; v1(985.3,266.4) 986.08,265.62 1025.36,265.62 U5.11
  Bottom Layer w10: v1(670,265.28) 984.17,265.28 v1(985.3,266.4) ; J2.2 540,1583.15 540,1120 1130,530 1130,376.77 1018.51,265.28 v1@984.62,265.28
RST: J2.1 U2.7 U5.7 | length 2672.7
  Top Layer w10: U2.7 494.67,340.81 549.19,340.81 v1(550,340) ; U5.7 797.72,337.76 822.96,337.76 860,300.71 v1(860,230)
  Bottom Layer w10: v1(550,340) 550,300 620,230 1005.86,230 1146,370.14 1146,540 556,1130 556,1544.62 751.38,1740 J2.1
SCK: J1.2 U1.2 | length 244.8
  Top Layer w10: J1.2 223.43,1335 U1.2
Vbat: C3.1 C4.1 J3.2 L1.1 U4.4 U4.5 | length 810.3
  Top Layer w25: C4.1 C3.1 L1.1@959.96,1490 ; L1.1@959.96,1434.96 L1.1 ; U4.5 U4.4 1026.85,1358.15 965,1420 L1.1 ; J3.2 965,1673.43 L1.1
pads on no net: U1.7 U2.8 U4.6 U5.8 U6.1 U6.5 U7.1 U7.5 U8.1 U8.5 U9.1 U9.5

## Polygon pours and split planes (outlines as drawn)
GND on Bottom Layer "NONET_L-01_P-001" (solid, pour order 1): 0,0 0,1880 1510,1880 1510,0
GND on Top Layer "NONET_L-01_P-001" (solid, pour order 0): 0,0 0,1880 1510,1880 1510,0

## Keep-outs
Keep-Out Layer:
  lines w30: 910,1880 910,1730 770,1590 680,1590 610,1520 610,1160 750,1020 1345,1020

## Silkscreen, mask and mechanical layers (free items; w line width, h text height)
Top Overlay:
  circle w10: c1368.42,1740 r98.43
  circle w10: c150,1740 r98.43
  circle w10: c150,140 r98.43
  circle w10: c1368.43,140 r98.43
  text "RadCnt / X4v1.0" at 240,1040 h30
  text "@" at 640,1039.07 h500